# Altium PCB lab1.PcbDoc
Units mm, origin at the board's own origin, x right, y up, seen from the top; angles counter-clockwise.
Board outline 152.4 x 101.6 mm, 2 copper layers (Top Layer, Bottom Layer); 40 components, 45 nets, 207 pads, 6 vias.
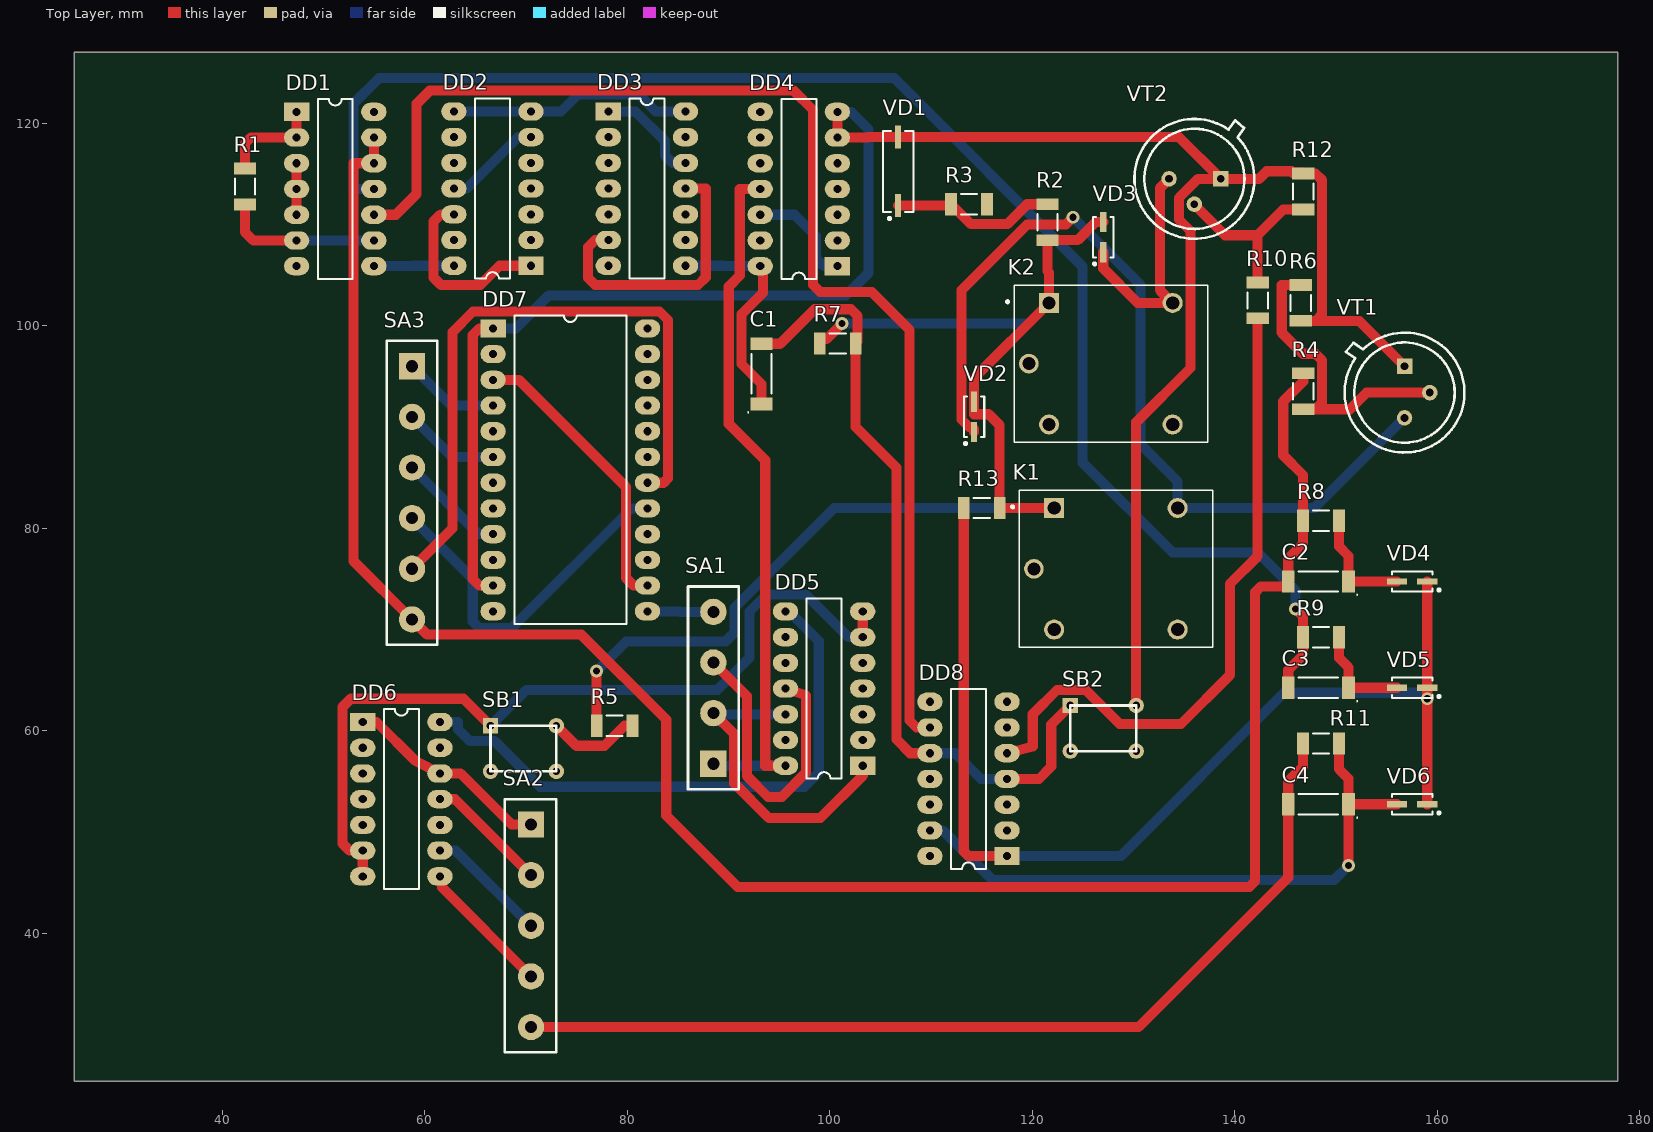
[diagram p0: Top Layer view]
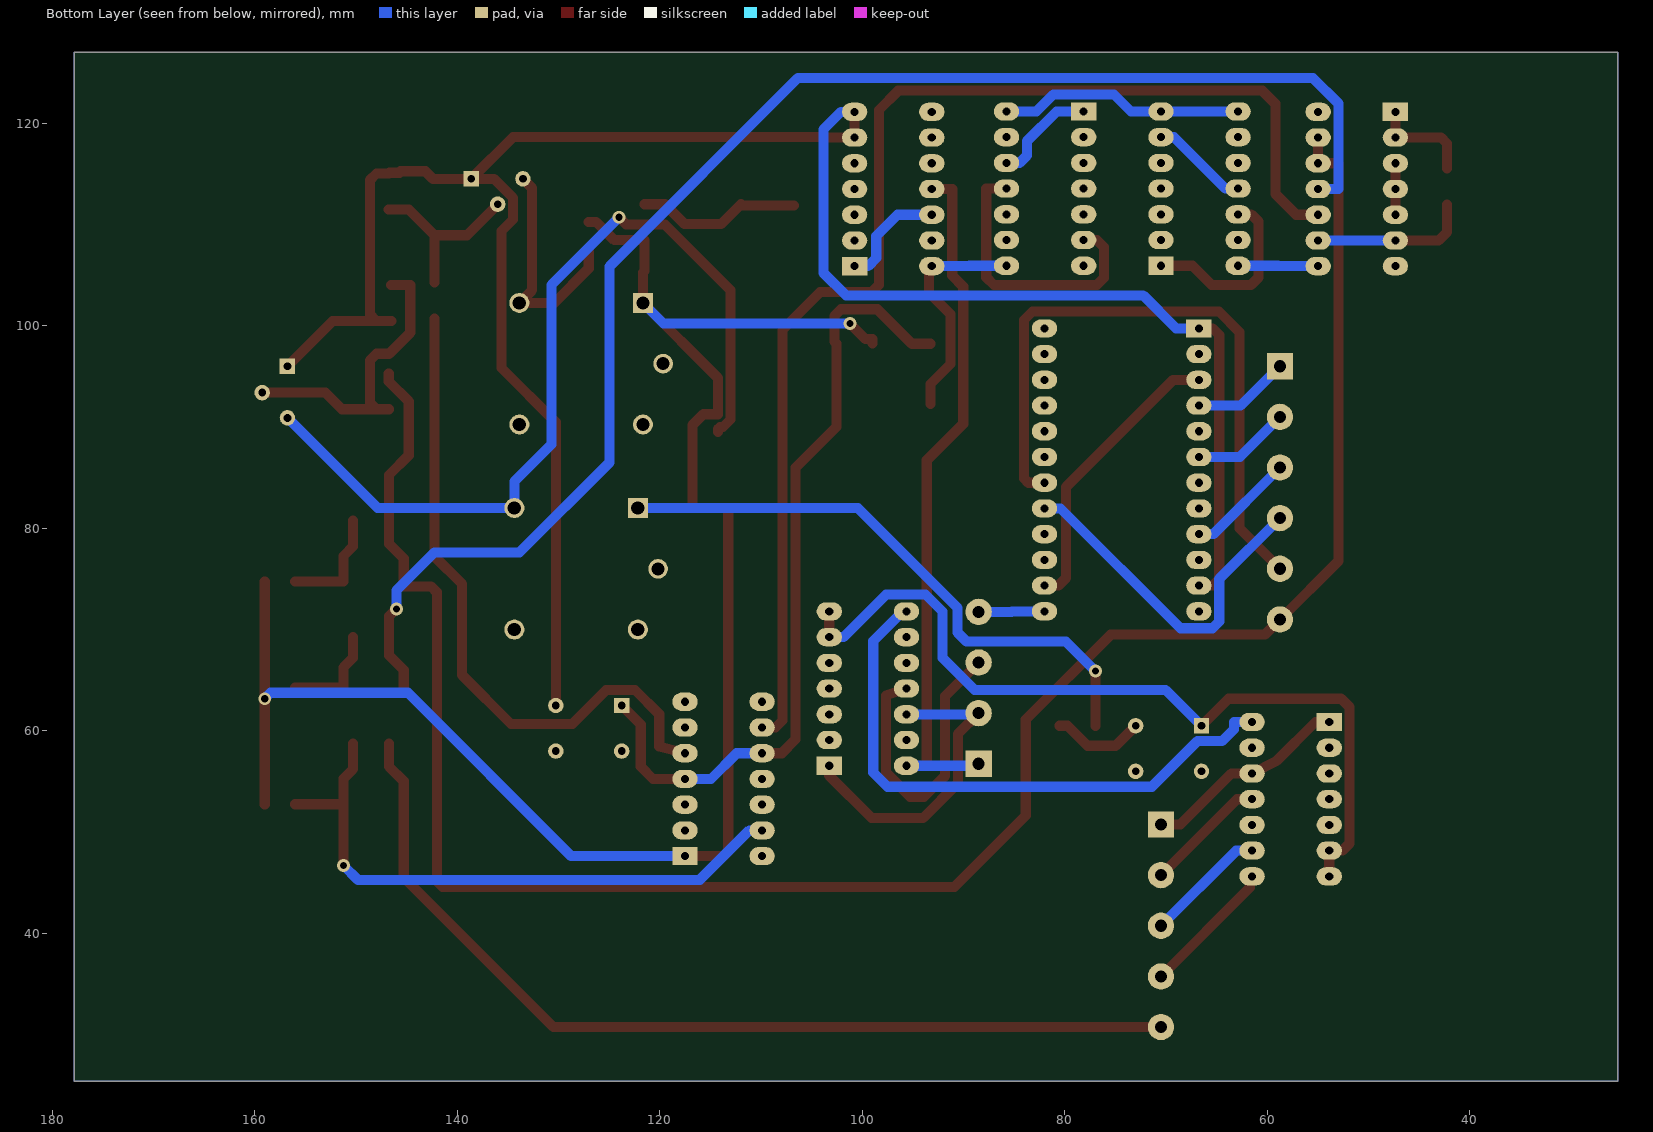
[diagram p1: Bottom Layer view, seen from below]

## Layer stack, top to bottom
Top Solder: solder mask 0.0102, Solder Resist, Dk 3.5
Top Layer: signal copper 0.0356
Dielectric 1: dielectric 0.32, FR-4, Dk 4.8
Bottom Layer: signal copper 0.0356
Bottom Solder: solder mask 0.0102, Solder Resist, Dk 3.5

## Board outline
25.4,25.4 177.8,25.4 177.8,127 25.4,127

## Design rules (kind name [scope] priority, off if disabled: settings)
Clearance [All] p1: gap=0.254 ignorepadtopadclearanceinfootprint=FALSE except(0: Arc-Hole Track-Hole SMDPad-Hole THPad-Hole Via-Hole Fill-Hole Poly-Hole Region-Hole Text-Hole)
PolygonConnect [All] p1: connectstyle=Relief reliefconductorwidth=0.254 reliefentries=4 polygonreliefangle="90 Angle" airgapwidth=0.254
RoomDefinition lab1 [InComponentClass('lab1')] p1: confinementstyle=ConfineIn formatcopy=TRUE lockcomponents=FALSE outline 197.777,28.551 540.677,28.551 540.677,62.079 197.777,62.079
RoutingVias [All] p1: holewidth=0.711 width=1.27 viastyle="Through Hole" minholewidth=0.711 minwidth=1.27 maxholewidth=0.711 maxwidth=1.27
SilkToSilkClearance [All] p1: silktosilkclearance=0.15
SilkToSolderMaskClearance [IsPad] p1: minsilkscreentomaskgap=0.15 clearancetoexposedcopper=TRUE
SolderMaskExpansion [All] p1: expansion=0.102 istentingtop=FALSE
Width [All] p1: maxlimit=1 minlimit=1 preferedwidth=1 minimp=50.000000 maximp=50.000000 favimp=50.000000
28 further rules are at their usual default settings.

## Components (designator, comment, footprint, x,y, rotation, side; value= is the part's Value field where it differs from the comment)
C1 "Condensator" SM127P600-8N 93.25,95.25 r90 top
C2 "Condensator" SM127P600-8N 148.25,74.75 r180 top
C3 "Condensator" SM127P600-8N 148.25,64.25 r180 top
C4 "Condensator" SM127P600-8N 148.25,52.75 r180 top
DD1 "k155la3" k155la3 47.356,121.122 r0 top
DD2 "K155IE4" k155ie4 70.5,105.92 r180 top
DD3 "K155IE4" k155ie4 78.13,121.16 r0 top
DD4 "K155IE4" k155ie4 100.75,105.88 r180 top
DD5 "K155IE4" k155ie4 103.25,56.55 r180 top
DD6 "K155IE4" k155ie4 53.88,60.87 r0 top
DD7 "K155IR17" k155ir17 66.76,99.74 r0 top
DD8 "K155TM2" k155tm2 117.5,47.63 r180 top
K1 "Releu" RELAY_SRD-05VDC-SL-C 128.25,76 r0 top
K2 "Releu" RELAY_SRD-05VDC-SL-C 127.75,96.25 r0 top
R1 "Resistor" RESC3517X06N 42.25,113.75 r270 top
R2 "Resistor" RESC3517X06N 121.5,110.225 r90 top
R3 "Resistor" RESC3517X06N 113.75,112 r0 top
R4 "Resistor" RESC3517X06N 146.75,93.525 r270 top
R5 "Resistor" RESC3517X06N 78.75,60.5 r0 top
R6 "Resistor" RESC3517X06N 146.5,102.25 r90 top
R7 "Resistor" RESC3517X06N 100.775,98.25 r0 top
R8 "Resistor" RESC3517X06N 148.5,80.75 r0 top
R9 "Resistor" RESC3517X06N 148.5,69.25 r0 top
R10 "Resistor" RESC3517X06N 142.25,102.5 r90 top
R11 "Resistor" RESC3517X06N 148.5,58.75 r0 top
R12 "Resistor" RESC3517X06N 146.75,113.25 r270 top
R13 "Resistor" RESC3517X06N 115,82 r0 top
SA1 "3P1N" SA1 88.5,56.75 r90 top
SA2 "4P1N" SA2 70.5,50.75 r270 top
SA3 "5P1N" SA3 58.75,96 r270 top
SB1 "Intrerupator" Buton 69.75,58.25 r0 top
SB2 "Intrerupator" Buton 127,60.25 r0 top
VD1 "KC139A" Zener 106.75,115.25 r90 top
VD2 "KD522B" Dioda 114.25,91 r90 top
VD3 "KD522B" Dioda 127,108.75 r90 top
VD4 "KD522B" Dioda 157.5,74.75 r180 top
VD5 "KD522B" Dioda 157.5,64.25 r180 top
VD6 "KD522B" Dioda 157.5,52.75 r180 top
VT1 "KT3102G" "Transistor NPN" 156.75,93.4 r0 top
VT2 "KT3102G" "Transistor NPN" 136,114.5 r270 top

## Footprints (in the part's own frame and the unit in brackets; to place one, negate y for a bottom-side part, rotate by r counter-clockwise, add the part's x,y. Pads: shape width x height; smd on the part's side, far side on the other; paste and mask are expansions set on the pad)
Buton [mil] "Pushbutton PTS645"
  rect 60x60 hole 30: 1(-127.95,88.58)
  round 60 hole 30: 2(127.95,88.58) 3(-127.95,-88.58) 4(127.95,-88.58)
  silkscreen extent -128,-89 128,89
Dioda [mm] "Dioda KD522B"
  rect 2x0.6 smd: 1(-1.5,0) 2(1.5,0)
  silkscreen extent -2.77,-1 2,1, body extent -2,-1 2,1, height 2
k155ie4 [mm]
  rect 2.5x1.8 hole 0.8: 1(0,0)
  oval 2.5x1.8 hole 0.8: 2(0,-2.54) 3(0,-5.08) 4(0,-7.62) 5(0,-10.16) 6(0,-12.7) 7(0,-15.24) 8(7.62,-15.24) 9(7.62,-12.7) 10(7.62,-10.16) 11(7.62,-7.62) 12(7.62,-5.08) 13(7.62,-2.54) 14(7.62,0)
  silkscreen extent 2.09,-16.51 5.54,1.27
k155ir17 [mm]
  rect 2.5x1.8 hole 0.8: 1(0,0)
  oval 2.5x1.8 hole 0.8: 2(0,-2.54) 3(0,-5.08) 4(0,-7.62) 5(0,-10.16) 6(0,-12.7) 7(0,-15.24) 8(0,-17.78) 9(0,-20.32) 10(0,-22.86) 11(0,-25.4) 12(0,-27.94) 13(15.24,-27.94) 14(15.24,-25.4) 15(15.24,-22.86) 16(15.24,-20.32) 17(15.24,-17.78) 18(15.24,-15.24) 19(15.24,-12.7) 20(15.24,-10.16) 21(15.24,-7.62) 22(15.24,-5.08) 23(15.24,-2.54) 24(15.24,0)
  silkscreen extent 2.08,-29.21 13.15,1.27
k155la3 [mm]
  rect 2.5x1.8 hole 0.8: 1(0,0)
  oval 2.5x1.8 hole 0.8: 2(0,-2.54) 3(0,-5.08) 4(0,-7.62) 5(0,-10.16) 6(0,-12.7) 7(0,-15.24) 8(7.62,-15.24) 9(7.62,-12.7) 10(7.62,-10.16) 11(7.62,-7.62) 12(7.62,-5.08) 13(7.62,-2.54) 14(7.62,0)
  silkscreen extent 2.09,-16.51 5.53,1.27
k155tm2 [mm]
  rect 2.5x1.8 hole 0.8: 1(0,0)
  oval 2.5x1.8 hole 0.8: 2(0,-2.54) 3(0,-5.08) 4(0,-7.62) 5(0,-10.16) 6(0,-12.7) 7(0,-15.24) 8(7.62,-15.24) 9(7.62,-12.7) 10(7.62,-10.16) 11(7.62,-7.62) 12(7.62,-5.08) 13(7.62,-2.54) 14(7.62,0)
  silkscreen extent 2.09,-16.51 5.54,1.27
RELAY_SRD-05VDC-SL-C [mm]
  rect 1.98x1.98 / inner round 1.98 / far side rect 1.98x1.98 hole 1.32: 1(-6.1,6)
  round 1.98 hole 1.32: 2(6.1,6) 4(-6.1,-6) 5(6.1,-6)
  round 1.935 hole 1.29: 3(-8.1,0)
  silkscreen extent -10.3,-7.75 9.55,7.75, body extent -9.6,-7.8 9.6,7.8, height 15.8
RESC3517X06N [mm] "Chip Resistor, 2-Leads, Body 3.50x1.70mm, IPC Medium Density"
  rect 1.15x2.2 smd: 1(-1.775,0) 2(1.775,0)
  silkscreen extent -0.8,-1 0.8,1, body extent -2,-1.1 2,1.1, height 0.6
SA1 [mm] "SA1 KLS2 3pins"
  rect 2.6x2.6 hole 1.2: 1(0,0)
  round 2.6 hole 1.2: 2(5,0) 4(10,0) S(15,0)
  silkscreen extent -2.5,-2.5 17.5,2.5
SA2 [mm] "SA1 KLS2 4pins"
  rect 2.6x2.6 hole 1.2: 2(0,0)
  round 2.6 hole 1.2: 4(5,0) 6(10,0) 12(15,0) S(20,0)
  silkscreen extent -2.5,-2.6 22.5,2.5
SA3 [mm] "SA1 KLS2 5pins"
  round 2.6 hole 1.2: 1_1(10,0) 1_2(5,0) 2_1(15,0) 4_1(20,0) S(25,0)
  rect 2.6x2.6 hole 1.2: 1_4(0,0)
  silkscreen extent -2.5,-2.5 27.5,2.5
SM127P600-8N [mm] "Capacitor"
  rect 1.25x2.2 smd: 1(-2.975,0) 2(2.975,0)
  silkscreen extent -3.86,-1 1.95,1.36, body extent -3.15,-1.1 3.15,1.1, height 11
"Transistor NPN" [mm] "Transistor KT3102G"
  round 1.53 hole 0.762: B(2.5,0) C(0,-2.5)
  rect 1.53x1.53 hole 0.762: E(0,2.6)
  silkscreen extent -5.91,-5.91 5.92,5.92
Zener [mm] "Dioda Zener KS139A"
  rect 2.25x0.6 smd: 1(-3.375,0) 2(3.375,0)
  silkscreen extent -4.77,-1.5 4,1.5, body extent -4,-1.5 4,1.5, height 3

## Part data
DD2 DD3 DD4 DD5 DD6: library part k155ie4
DD7: library part k155ir17
DD8: library part k155tm2
SA1: library part SA1
SA2: library part SA2
SA3: library part SA3
VD1: library part Zener
VD2 VD3 VD4 VD5 VD6: library part Dioda
VT1 VT2: library part TransistorNPN

## Via types
v1: diameter 1.27, hole 0.711, Top Layer to Bottom Layer, 6 vias

## Nets (pads, with @x,y where several pads share a name; then routed paths per layer and width w, separated by ;. In a path a pad name is that pad's centre, name@x,y a point inside that pad or via, vN(x,y) a via of type N, cw(c..) or ccw(c..) an arc to the next point about the centre after c; other vN are vias at no path point)
B: C1.1 DD3.8 DD4.14 | length 23
  Top Layer w1: DD4.14 93.402,105.88 93.402,103.243 91.288,101.129 91.288,96.215 93.25,94.253 C1.1
  Bottom Layer w1: DD3.8 89.408,105.92 89.448,105.88 DD4.14
C: DD1.10 DD8.9 | length 124
  Top Layer w1: DD1.10 57.15,110.962 59.207,113.019 59.207,121.92 60.503,123.215 96.444,123.215 98.349,121.31 98.349,104.038 99.06,103.327 104.14,103.327 107.874,99.593 107.874,61.016 108.56,60.33 DD8.9
GND: DD4.6 DD4.7 DD7.1 DD7.11 R6.1 R12.1 SB2.2 VD1.2 VT1.E VT2.E | length 222.7
  Top Layer w1: DD7.11 65.405,74.34 64.745,75 64.745,99.08 65.405,99.74 DD7.1 ; DD4.7 DD4.6 103.708,118.58 103.753,118.625 VD1.2 134.475,118.625 VT2.E ; SB2.2 130.25,90.474 135.611,95.834 135.611,109.36 134.481,110.49 134.481,112.629 136.352,114.5 VT2.E ; R6.1 147.955,100.475 ; VT1.E 152.275,100.475 147.955,100.475 ; VT2.E 142.392,114.5 143.142,115.25 145.564,115.25 145.714,115.1 146.675,115.1 R12.1 147.955,115.025 148.615,114.365 148.615,101.135 147.955,100.475
  Bottom Layer w1: DD7.1 69.006,99.74 72.263,102.997 101.6,102.997 103.835,105.232 103.835,119.38 102.095,121.12 DD4.7
NetC1_2: C1.2 DD8.4 DD8.10 R7.2 SB2.1 | length 79
  Top Layer w1: C1.2 95.101,98.225 98.504,101.628 102.087,101.628 102.75,100.965 102.75,98.45 R7.2 102.55,90.007 106.578,85.979 106.578,59.162 107.95,57.79 DD8.10 ; DD8.4 120.65,55.25 121.869,56.469 121.869,60.619 SB2.1
  Bottom Layer w1: DD8.10 112.395,57.79 114.935,55.25 DD8.4
NetC2_1: C2.1 R8.2 VD4.2 | length 11.2
  Top Layer w1: R8.2 150.275,78.217 151.225,77.267 C2.1 VD4.2
NetC2_2: C2.2 DD1.12 DD1.13 R4.1 R8.1 SA3.S | length 207.3
  Top Layer w1: DD1.13 DD1.12 52.959,116.042 52.959,76.791 SA3.S 60.256,69.494 75.463,69.494 83.845,61.112 83.845,51.638 90.907,44.577 141.414,44.577 142,45.163 142,73.684 142.586,74.27 145.275,74.27 C2.2 145.275,77.013 146.725,78.463 R8.1 146.725,85.268 144.78,87.213 144.78,92.532 146.75,94.502 R4.1
NetC3_1: C3.1 R9.2 VD5.2 | length 10.2
  Top Layer w1: R9.2 150.275,67.219 151.225,66.269 C3.1 VD5.2
NetC3_2: C3.2 DD1.11 R9.1 | length 147.3
  Top Layer w1: C3.2 145.275,66.015 146.725,67.465 R9.1 146.725,71.309 v1(145.999,72.034)
  Bottom Layer w1: DD1.11 52.959,113.502 52.959,121.92 55.499,124.46 106.35,124.46 124.943,105.867 124.943,86.512 133.833,77.622 142.24,77.622 145.999,73.863 v1(145.999,72.034)
NetC4_1: C4.1 DD8.13 R11.2 VD6.2 | length 61.2
  Top Layer w1: R11.2 150.275,56.22 151.225,55.27 C4.1 ; v1(151.225,46.711) C4.1 ; VD6.2 153.594,52.75 C4.1
  Bottom Layer w1: DD8.13 111.145,50.17 116.027,45.288 149.803,45.288 v1(151.225,46.711)
NetC4_2: C4.2 R11.1 SA2.S | length 94.7
  Top Layer w1: SA2.S 130.5,30.75 145.275,45.525 C4.2 145.275,55.016 146.725,56.466 R11.1
NetDD1_1: DD1.1 DD1.2 R1.1 | length 10.4
  Top Layer w1: R1.1 42.25,117.996 42.836,118.582 DD1.2 DD1.1
NetDD1_3: DD1.3 DD1.4 DD1.5 | length 5.1
  Top Layer w1: DD1.5 DD1.4 DD1.3
NetDD1_6: DD1.6 DD1.9 R1.2 | length 15.8
  Top Layer w1: R1.2 42.25,111.91 42.24,111.9 42.24,109.26 43.078,108.422 DD1.6
  Bottom Layer w1: DD1.6 DD1.9
NetDD1_8: DD1.8 DD2.14 | length 7.9
  Bottom Layer w1: DD1.8 58.903,105.882 58.941,105.92 DD2.14
NetDD2_1: DD2.1 DD2.12 | length 18.5
  Top Layer w1: DD2.12 61.595,111 60.858,110.263 60.858,104.775 61.595,104.038 65.505,104.038 67.386,105.92 DD2.1
NetDD2_6: DD2.6 DD2.11 | length 9.7
  Bottom Layer w1: DD2.11 64.135,113.54 69.215,118.62 DD2.6
NetDD2_7: DD2.7 DD2.8 DD3.14 | length 24.3
  Bottom Layer w1: DD2.8 DD2.7 73.457,121.16 75.131,122.834 81.128,122.834 82.802,121.16 DD3.14
NetDD3_1: DD3.1 DD3.12 | length 10.6
  Bottom Layer w1: DD3.1 80.797,121.16 83.744,118.214 83.744,116.791 84.455,116.08 DD3.12
NetDD3_6: DD3.6 DD3.11 | length 28.3
  Top Layer w1: DD3.6 76.835,108.46 76.124,107.749 76.124,104.724 76.835,104.013 86.995,104.013 87.757,104.775 87.757,113.54 DD3.11
NetDD4_1: DD4.1 DD4.12 | length 11
  Bottom Layer w1: DD4.12 96.52,110.96 98.615,108.865 98.615,106.68 99.415,105.88 DD4.1
NetDD4_11: DD4.11 DD5.14 SA1.1 | length 70.1
  Top Layer w1: DD4.11 91.11,113.5 91.11,104.953 90.018,103.861 90.018,90.322 93.624,86.716 93.624,56.55 DD5.14
  Bottom Layer w1: SA1.1 88.7,56.55 DD5.14
NetDD5_1: DD5.1 DD5.12 SA1.2 | length 31.8
  Top Layer w1: SA1.2 90.554,59.696 90.554,54.81 93.98,51.384 99.06,51.384 103.251,55.575 DD5.1
  Bottom Layer w1: SA1.2 88.62,61.63 DD5.12
NetDD5_6: DD5.6 DD5.7 DD6.6 DD6.7 SB1.1 | length 83.5
  Top Layer w1: DD6.7 DD6.6 52.592,48.17 51.867,48.895 51.867,62.332 52.705,63.17 63.83,63.17 SB1.1 ; DD5.6 DD5.7
  Bottom Layer w1: SB1.1 70.033,64.033 88.9,64.033 92.075,67.208 92.075,71.78 93.751,73.457 97.638,73.457 101.844,69.25 DD5.6
NetDD5_8: DD5.8 DD6.14 | length 58.5
  Bottom Layer w1: DD6.14 63.297,60.87 63.297,60.147 64.465,58.979 66.904,58.979 71.399,54.483 97.511,54.483 98.908,55.88 98.908,68.869 95.987,71.79 DD5.8
NetDD5_11: DD5.11 SA1.4 | length 30
  Top Layer w1: SA1.4 91.808,63.442 91.808,55.563 93.904,53.467 95.25,53.467 97.638,55.855 97.638,63.5 DD5.11
NetDD6_1: DD6.1 DD6.12 SA2.2 | length 20.6
  Top Layer w1: DD6.1 55.245,60.87 59.08,57.035 DD6.12 63.551,55.79 68.591,50.75 SA2.2
NetDD6_8: DD6.8 SA2.12 | length 13.7
  Top Layer w1: DD6.8 61.722,45.63 61.722,44.528 SA2.12
NetDD6_9: DD6.9 SA2.6 | length 12.1
  Bottom Layer w1: DD6.9 63.08,48.17 SA2.6
NetDD6_11: DD6.11 SA2.4 | length 12.1
  Top Layer w1: DD6.11 63,53.25 SA2.4
NetDD7_3: DD7.3 DD7.14 | length 28.9
  Top Layer w1: DD7.3 69.291,94.66 79.863,84.088 79.863,75.122 80.645,74.34 DD7.14
NetDD7_4: DD7.4 SA3.1_4 | length 9.6
  Bottom Layer w1: SA3.1_4 62.63,92.12 DD7.4
NetDD7_6: DD7.6 SA3.1_2 | length 9.7
  Bottom Layer w1: SA3.1_2 62.71,87.04 DD7.6
NetDD7_9: DD7.9 SA3.1_1 | length 10.7
  Bottom Layer w1: SA3.1_1 65.33,79.42 DD7.9
NetDD7_13: DD7.13 SA1.S | length 6.5
  Bottom Layer w1: DD7.13 85.217,71.8 85.267,71.75 SA1.S
NetDD7_17: DD7.17 SA3.2_1 | length 35.1
  Bottom Layer w1: SA3.2_1 64.745,75.005 64.745,70.79 65.405,70.129 68.58,70.129 80.411,81.96 DD7.17
NetDD7_18: DD7.18 SA3.4_1 | length 65.3
  Top Layer w1: SA3.4_1 62.738,79.988 62.738,99.365 64.77,101.397 83.185,101.397 84.023,100.559 84.023,84.932 83.591,84.5 DD7.18
NetDD8_1: DD8.1 R13.1 VD4.1 VD5.1 VD6.1 | length 108.8
  Top Layer w1: R13.1 113.225,48.095 113.69,47.63 DD8.1 ; VD6.1 v1(159,63.174) VD5.1 VD4.1
  Bottom Layer w1: DD8.1 128.727,47.63 144.851,63.754 158.42,63.754 v1(159,63.174)
NetDD8_5: DD8.5 R10.1 | length 66
  Top Layer w1: DD8.5 120.04,58.45 120.04,61.646 122.428,64.033 125.273,64.033 128.333,60.973 128.626,60.681 134.681,60.681 139.5,65.5 139.5,74.5 142.25,77.25 R10.1
NetK1_2: K1.2 VD2.1 VT1.C | length 87.8
  Top Layer w1: VD2.1 114.25,89.8 114.05,90 113.739,90 112.996,90.743 112.996,95.369 113,95.373 113,103.5 119.5,110 123.295,110 124.001,110.706 v1(124.015,110.706)
  Bottom Layer w1: v1(124.015,110.706) 130.683,104.038 130.683,88.29 134.35,84.623 K1.2 147.85,82 VT1.C
NetK2_2: K2.2 VD3.1 VT2.C | length 23
  Top Layer w1: VD3.1 127,105.664 130.414,102.25 K2.2 132.588,103.512 132.588,113.588 VT2.C
NetR2_2: R2.2 R3.1 VD1.1 | length 16.5
  Top Layer w1: VD1.1 111.9,111.875 111.975,111.95 R3.1 113.942,110.033 117.526,110.033 119.493,112 R2.2
NetR4_2: R4.2 R6.2 VT1.B | length 30
  Top Layer w1: R6.2 144.628,104.025 144.628,99.314 146.71,97.231 147.955,97.231 148.615,96.571 148.615,92.41 147.955,91.75 ; R4.2 147.955,91.75 ; VT1.B 153.009,93.4 151.359,91.75 147.955,91.75
NetR5_2: R5.2 SB1.2 | length 9.2
  Top Layer w1: SB1.2 74.978,58.522 77.749,58.522 79.728,60.5 R5.2
NetR10_2: R10.2 R12.2 VT2.B | length 17.8
  Top Layer w1: VT2.B 136.165,111.801 139.031,108.935 142.24,108.935 ; R10.2 142.24,104.275 142.24,108.935 ; R12.2 144.78,111.475 142.24,108.935
VCC: K1.1 K2.1 R2.1 R5.1 R7.1 R13.2 VD2.2 VD3.2 | length 126.3
  Top Layer w1: R5.1 v1(76.975,65.901) ; R7.1 99,98.679 99.67,98.679 v1(101.219,100.228) ; K1.1 R13.2 116.775,90.17 115.683,91.262 114.25,91.262 VD2.2 114.25,94.85 K2.1 121.65,105.258 121.5,105.408 R2.1 124.472,108.45 126.272,110.25 VD3.2
  Bottom Layer w1: v1(76.975,65.901) 79.883,68.809 89.687,68.809 90.576,69.698 90.576,72.136 100.44,82 K1.1 ; v1(101.219,100.228) 119.628,100.228 K2.1
pads on no net: DD1.7 DD1.14 DD2.2 DD2.3 DD2.4 DD2.5 DD2.9 DD2.10 DD2.13 DD3.2 DD3.3 DD3.4 DD3.5 DD3.7 DD3.9 DD3.10 DD3.13 DD4.2 DD4.3 DD4.4 DD4.5 DD4.8 DD4.9 DD4.10 DD4.13 DD5.2 DD5.3 DD5.4 DD5.5 DD5.9 DD5.10 DD5.13 DD6.2 DD6.3 DD6.4 DD6.5 DD6.10 DD6.13 DD7.2 DD7.5 DD7.7 DD7.8 DD7.10 DD7.12 DD7.15 DD7.16 DD7.19 DD7.20 DD7.21 DD7.22 DD7.23 DD7.24 DD8.2 DD8.3 DD8.6 DD8.7 DD8.8 DD8.11 DD8.12 DD8.14 K1.3 K1.4 K1.5 K2.3 K2.4 K2.5 R3.2 SB1.3 SB1.4 SB2.3 SB2.4

## Polygon pours and split planes (outlines as drawn)
no net on Top Layer "NONET_L01_P000" (solid, shelved, pour order 0): 25.4,25.4 177.8,25.4 177.8,127 25.4,127
no net on Bottom Layer "NONET_L02_P001" (solid, shelved, pour order 1): 25.4,25.4 177.8,25.4 177.8,127 25.4,127